# Altium PCB DisplayPCB.PcbDoc (part 2 of 2)
Units mil, origin at the board's own origin, x right, y up, seen from the top; angles counter-clockwise.
Board outline 3900 x 3000 mil, 2 copper layers (Top Layer, Bottom Layer); 68 components, 81 nets, 271 pads, 0 vias.
Unrouted connection lines stored in the file: 162.
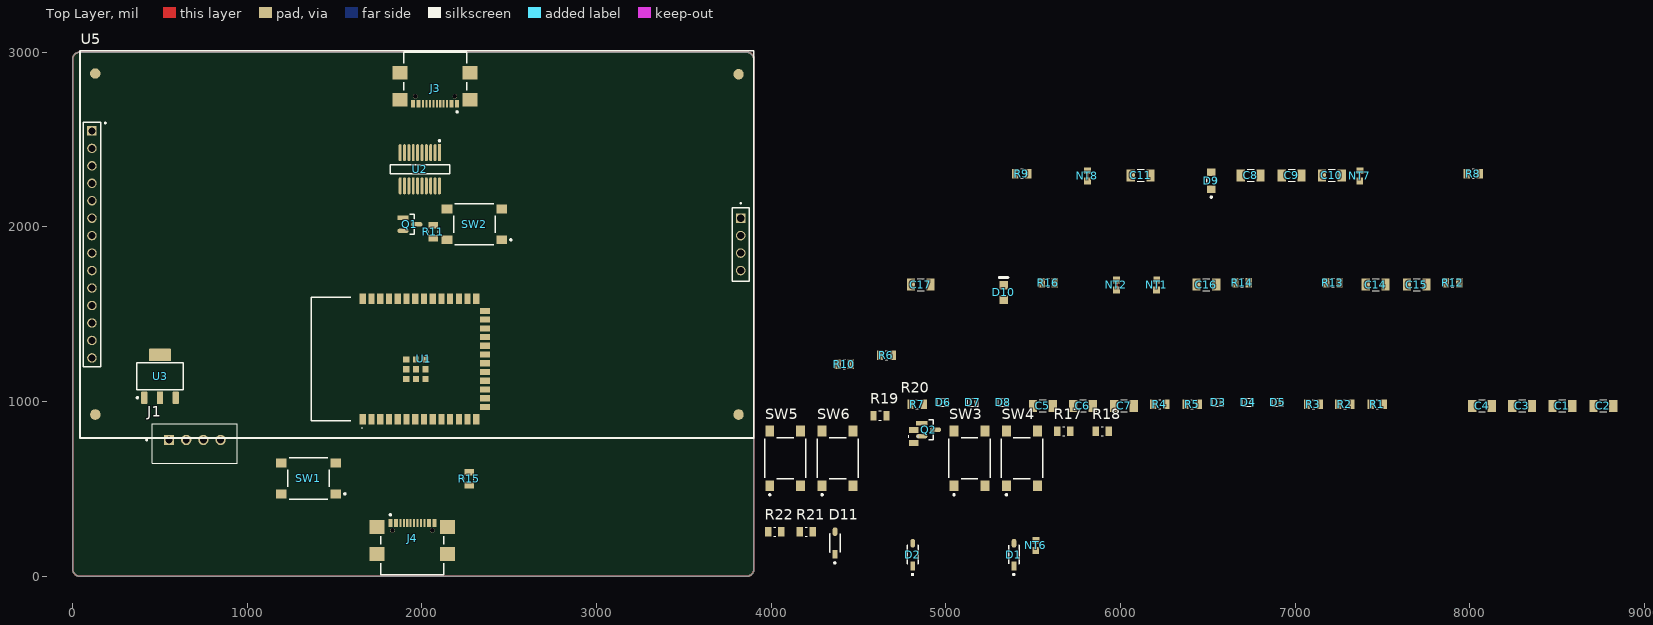
[diagram p0: Top Layer view]

## Part data (continued)
U2: "IC USB SERIAL FULL UART 20SSOP", Case/Package=SSOP, Manufacturer=FTDI, Max Operating Temperature=85°C, Max Supply Current=8.4mA, Max Supply Voltage=5.5V, Min Operating Temperature=-40°C, Min Supply Voltage=2.97V, Nominal Supply Voltage=5V, Package Body Material=Plastic, Package Equivalence Code=SSOP20,.25, Package Shape=Rectangular, Package Style="SMALL OUTLINE, SHRINK PITCHMeter", Power Supplies=3.3/5V, Supplier Part Number=768-1129-6-ND, Temperature Grade=INDUSTRIAL, Category="Interface ICs", ComponentLink1Description=https://datasheet.ciiva.com:443/pdfs/VipMasterIC/IC/FTDI/FTDIS00099/FTDIS00099-1.pdf?src-supplier=IHS+Markit, ComponentLink1URL=https://datasheet.ciiva.com:443/pdfs/VipMasterIC/IC/FTDI/FTDIS00099/FTDIS00099-1.pdf?src-supplier=IHS+Markit, ComponentLink2Description=https://datasheet.ciiva.com/30478/0900766b811020d3-30478147.pdf?src-supplier=Rs, ComponentLink2URL=https://datasheet.ciiva.com/30478/0900766b811020d3-30478147.pdf?src-supplier=Rs, ComponentLink3Description=https://datasheet.ciiva.com/1787/ft-x-series-1787028.pdf?src-supplier=Digikey, ComponentLink3URL=https://datasheet.ciiva.com/1787/ft-x-series-1787028.pdf?src-supplier=Digikey, ComponentLink4Description=https://datasheet.ciiva.com/1787/ft-x-series-1787029.pdf?src-supplier=Digikey, ComponentLink4URL=https://datasheet.ciiva.com/1787/ft-x-series-1787029.pdf?src-supplier=Digikey, ComponentLink5Description=https://datasheet.ciiva.com/1787/ft-x-series-1787030.pdf?src-supplier=Digikey, ComponentLink5URL=https://datasheet.ciiva.com/1787/ft-x-series-1787030.pdf?src-supplier=Digikey, ComponentLink6Description=https://datasheet.ciiva.com/48909/70403932-48909078.pdf?src-supplier=Allied+Electronics, ComponentLink6URL=https://datasheet.ciiva.com/48909/70403932-48909078.pdf?src-supplier=Allied+Electronics, Height - Seated (Max)=1.7526mm, JESD-30 Code=R-PDSO-G20, JESD-609 Code=e3, Length=8.6614mm, Manufacturer Part Number=FT231XS-R, Moisture Sensitivity Level=3, Pins=20, Pricing="1=2.34, 25=2.27, 100=2.2, 250=2, 500=1.825 (USD)", Qualification Status="Not Qualified", Reach SVHC Compliant=Yes, RoHS=Yes, RoHS Compliant=Yes, Stock=24743, Supplier=Digikey, Surface Mount=Yes, Technology=CMOS, Terminal Finish=Tin, Terminal Form="Gull Wing", Terminal Pitch=0.635mm, Terminal Position=DUAL, Width=3.9116mm
U3: "Linear Voltage Regulator IC Positive Fixed 1 Output 1.5A SOT-223-4", Case/Package=SOP, Dropout Voltage1-Max=550mV, Dropout Voltage1-Nom=340mV, Input Voltage Absolute-Max=20V, Manufacturer="Texas Instruments", Min Input Voltage=3.8V, Operating Temperature, TJ-Max=125°C, Operating Temperature, TJ-Min=-40°C, Output Current1-Max=1.5A, Output Voltage1-Max=3.4V, Output Voltage1-Min=3.2V, Output Voltage1-Nom=3.3V, Package Body Material=Plastic, Package Shape=Rectangular, Peak Reflow Temperature (Cel)=260°C, Supplier Part Number=296-24897-1-ND, Voltage Tolerance-Max=3%, Adjustability=FIXED, Category="Voltage Regulators - Linear", Channels=1, ComponentLink1Description=https://www.ti.com:443/lit/ds/symlink/tl1963a.pdf?src-supplier=IHS+Markit, ComponentLink1URL=https://www.ti.com:443/lit/ds/symlink/tl1963a.pdf?src-supplier=IHS+Markit, ComponentLink2Description=https://datasheet.ciiva.com/2046/-2046068.pdf?src-supplier=Digikey, ComponentLink2URL=https://datasheet.ciiva.com/2046/-2046068.pdf?src-supplier=Digikey, Height - Seated (Max)=1.8mm, JESD-30 Code=R-PDSO-G4, JESD-609 Code=e3, Length=6.5mm, Manufacturer Part Number=TL1963A-33DCYR, Max Supply Voltage=20V, Moisture Sensitivity Level=2, Number of Outputs=1, Packaging="Tape and Reel", Pins=4, Pricing="1=2.77, 10=2.069, 25=1.8936, 100=1.7, 250=1.60772, 500=1.55212, 1000=1.50634, 2500=1.45802, 5000=1.4289 (USD)", Qualification Status="Not Qualified", Reach SVHC Compliant=Yes, Regulator Type="FIXED POSITIVE SINGLE OUTPUT LDO REGULATOR", RoHS=Yes, RoHS Compliant=Yes, Stock=5722, Supplier=Digikey, Surface Mount=Yes, Technology=BIPOLAR, Terminal Finish=Tin, Terminal Form="Gull Wing", Terminal Pitch=2.3mm, Terminal Position=DUAL, Width=3.5mm
U5: "3.5inch SPI Module ILI9488 SKU:MSP3520"

## Nets (pads, with @x,y where several pads share a name; then routed paths per layer and width w, separated by ;. In a path a pad name is that pad's centre, name@x,y a point inside that pad or via, vN(x,y) a via of type N, cw(c..) or ccw(c..) an arc to the next point about the centre after c; other vN are vias at no path point)
+3V3: C10.2 C14.2 C15.2 NT7.2 R8.1 R13.2 R14.2 R17.2 R18.2 R19.2 R20.2 U1.2
+3V3_FTDI: C5.2 C7.2 R3.1 U2.3 U2.13
+3V3_REG: C9.2 NT7.1 U3.3
+5V_VBUS1: C1.2 C2.2 D2.2 D6.1 J3.A4-B9 J3.B4-A9 NT6.1
+5V_VBUS2: D1.2 D3.1 J4.A4-B9 J4.B4-A9
+VCC: C3.2 C4.2 C8.2 C11.2 D1.1 D2.1 D11.1 U3.1
"+VCC FTDI": NT6.2 U2.15
+VIN: D11.2 J1.1
\E\S\P\_\U\S\E\R\_\L\E\D\: D10.1 U1.8
ARDUINO_RX: J1.4 NT1.1
ARDUINO_TX: NT2.1 R21.1 R22.2
ARDUINO_TX_CON: J1.3 R21.2
BTN1: R17.1 SW3.1 SW3.2 U1.4
BTN2: R18.1 SW4.1 SW4.2 U1.5
BTN3: R19.1 SW5.1 SW5.2 U1.11
BTN4: R20.1 SW6.1 SW6.2 U1.12
CHIP_PU: C16.2 Q1.3 R13.1 SW1.1 SW1.2 U1.3
CON1_USB_N: D7.1 J3.A7 J3.B7 R1.1
CON1_USB_P: D8.1 J3.A6 J3.B6 R2.1
CON2_USB_N: D4.1 J4.A7 J4.B7 R15.1
CON2_USB_P: D5.1 J4.A6 J4.B6 R16.1
DTR_FTDI: Q2.2 R9.1 U2.1
ESP_UART2_RX: NT2.2 U1.7
ESP_UART2_TX: NT1.2 U1.6
ESP_USB_N: R15.2 U1.13
ESP_USB_P: R16.2 U1.14
FTDI_USB_N: R1.2 U2.12
FTDI_USB_P: R2.2 U2.11
FUSE_STRAP: U1.15
GND: C1.1 C2.1 C3.1 C4.1 C5.1 C6.1 C7.1 C8.1 C9.1 C10.1 C11.1 C14.1 C15.1 C16.1 C17.1 D3.2 D4.2 D5.2 D6.2 D7.2 D8.2 D9.1 J3.A1-B12 J3.B1-A12 J4.A1-B12 J4.B1-A12 NT8.2 R4.1 R5.1 R6.1 R7.1 R22.1 SW1.3 SW1.4 SW2.3 SW2.4 SW3.3 SW3.4 SW4.3 SW4.4 SW5.3 SW5.4 SW6.3 SW6.4 U1.1 U1.40 U1.41 U2.6 U2.16 U3.2 U3.4
GND_EXT: J1.2 NT8.1
GPIO0: C17.2 Q2.3 SW2.1 SW2.2 U1.27
GPIO16: U1.9
GPIO17: U1.10
GPIO38: U1.31
NetC6_2: C6.2 R3.2 U2.14
NetD10_2: D10.2 R14.1
NetJ3_A5: J3.A5 R7.2
NetJ3_A8: J3.A8
NetJ3_B5: J3.B5 R6.2
NetJ3_B8: J3.B8
NetJ4_A5: J4.A5 R5.2
NetJ4_A8: J4.A8
NetJ4_B5: J4.B5 R4.2
NetJ4_B8: J4.B8
NetQ1_1: Q1.1 R9.2
NetQ2_1: Q2.1 R10.2
NetU1_16: U1.16
NetU1_24: U1.24
NetU1_25: U1.25
NetU1_26: U1.26
NetU1_28: U1.28
NetU1_29: U1.29
NetU1_30: U1.30
NetU2_5: U2.5
NetU2_7: U2.7
NetU2_8: U2.8
NetU2_9: U2.9
NetU2_10: U2.10
NetU2_17: U2.17
NetU2_18: U2.18
NetU2_19: U2.19
POWER_LED: D9.2 R8.2
RTS_FTDI: Q1.2 R10.1 U2.2
RXD_FTDI: R12.2 U2.4
SD_CARD_CLK: U1.20 U5.18
SD_CARD_CS: U1.21 U5.15
SD_CARD_MISO: U1.18 U5.17
SD_CARD_MOSI: U1.19 U5.16
TFT_CLK: U1.33 U5.7 U5.10
TFT_MISO: U1.22 U5.13
TFT_MOSI: U1.23 U5.6 U5.12
TFT_Screen_CS: U1.39 U5.3
TFT_Screen_DC: U1.35
TFT_Screen_LED: U1.34 U5.8
TFT_Screen_RESET: U1.38
Touch_Interrupt_Signal: U1.17 U5.14
Touch_Screen_CS: U1.32 U5.11
TXD_FTDI: R11.2 U2.20
U0RXD: R11.1 U1.36
U0TXD: R12.1 U1.37
pads on no net: J3. J3.1 J3.2 J3.3 J3.4 J4. J4.1 J4.2 J4.3 J4.4 U1.42 U1.43 U1.44 U1.45 U1.46 U1.47 U1.48 U1.49 U5.01 U5.02 U5.03 U5.04 U5.05 U5.06 U5.07 U5.08 U5.09

## Other copper
Multi-Layer:
  the board outline again, w10